# Altium PCB DB4100_POW_v0.3.PcbDoc
Units mil, origin at the board's own origin, x right, y up, seen from the top; angles counter-clockwise.
Board outline 3937.01 x 866.14 mil, 2 copper layers (Top Layer, Bottom Layer); 3 components, 75 nets, 10 pads, 0 vias.
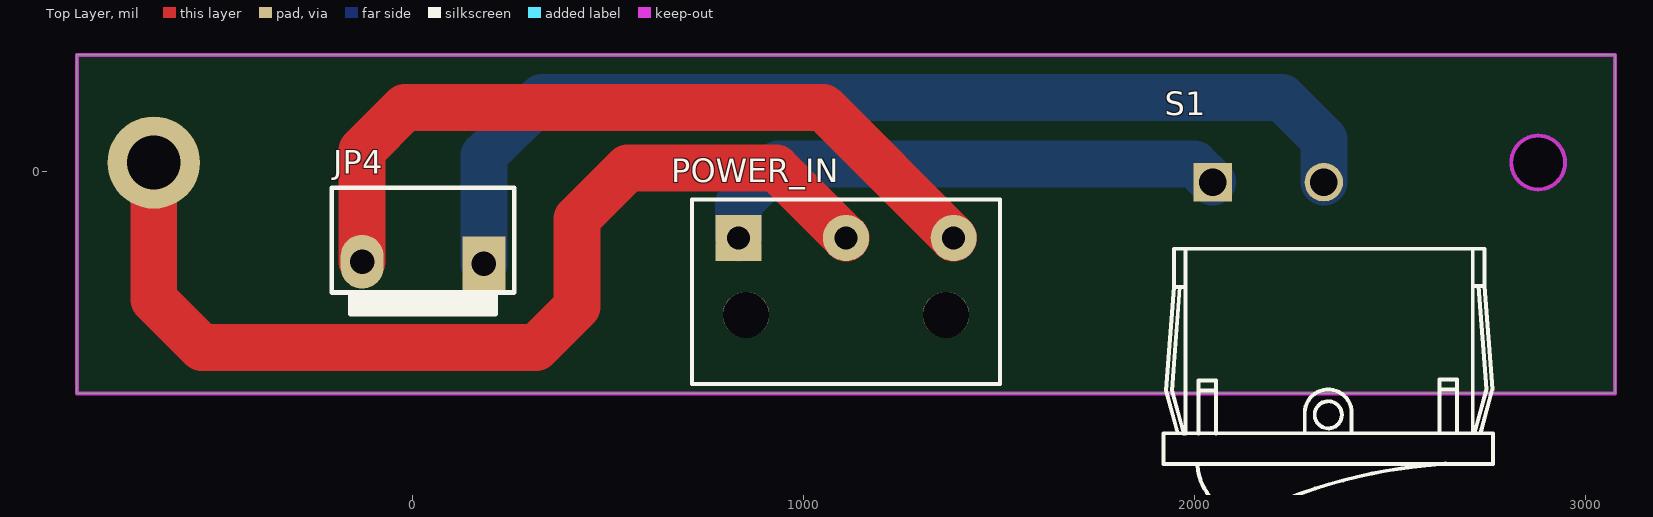
[diagram p0: Top Layer view]
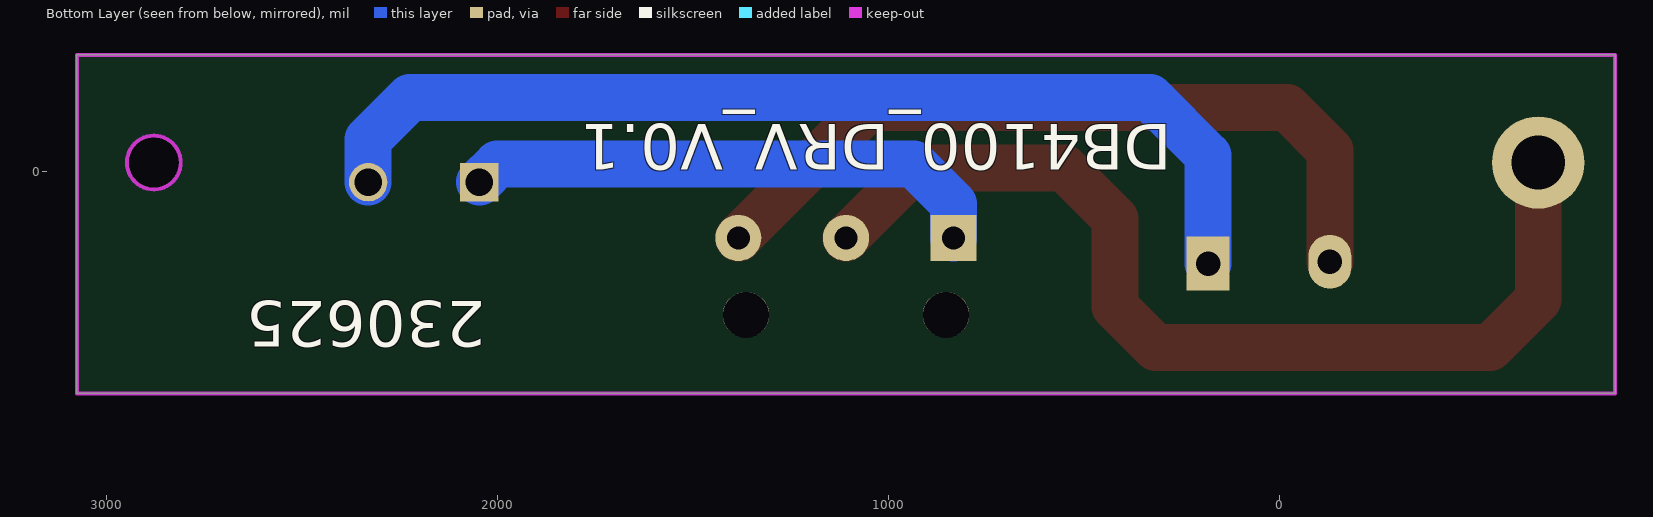
[diagram p1: Bottom Layer view, seen from below]
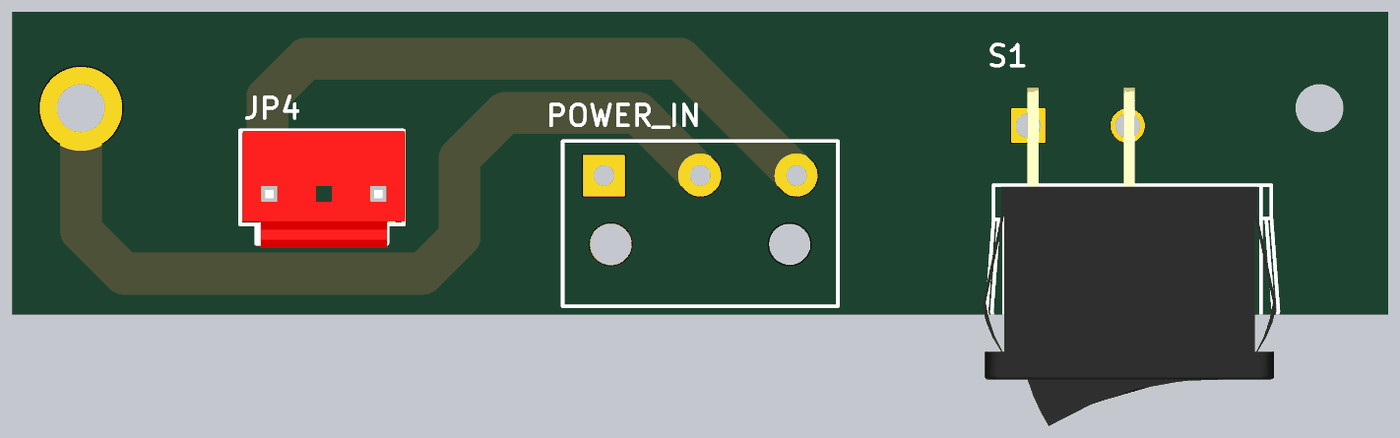
[diagram p2: 3D render of the assembled board from above, using the file's embedded part models]

## Layer stack, top to bottom
Top Solder: solder mask 0.4, Solder Resist, Dk 3.5
Top Layer: signal copper 1.4
Dielectric 1: dielectric 12.6, FR-4, Dk 4.8
Bottom Layer: signal copper 1.4
Bottom Solder: solder mask 0.4, Solder Resist, Dk 3.5

## Board outline
-860,-566.81 -860,299.33 3077.01,299.33 3077.01,-566.81
cut-out: 2811.26,23.74 ccw(c2880.16,23.74) 2880.16,-45.16 ccw(c2880.16,23.74) 2949.06,23.74 ccw(c2880.16,23.74) 2880.16,92.64 ccw(c2880.16,23.74)

## Design rules (kind name [scope] priority, off if disabled: settings)
Clearance [All] p1: gap=20 ignorepadtopadclearanceinfootprint=FALSE
PlaneClearance [All] p1: clearance=30
PlaneConnect [All] p1: planeconnectstyle=Relief reliefexpansion=30 reliefentries=4 reliefconductorwidth=20 reliefairgap=20
PolygonConnect [All] p1: connectstyle=Relief reliefconductorwidth=10 reliefentries=4 polygonreliefangle="90 Angle" airgapwidth=30
RoutingVias [All] p1: holewidth=28 width=50 viastyle="Through Hole" minholewidth=28 minwidth=50 maxholewidth=28 maxwidth=50
SolderMaskExpansion [All] p1: expansion=4
Width [All] p1: maxlimit=120 minlimit=10 preferedwidth=10
28 further rules are at their usual default settings.

## Components (designator, comment, footprint, x,y, rotation, side; value= is the part's Value field where it differs from the comment)
JP4 "HDR-1X2" VH3.96-3A_2P_R 181.81,-230 r180 top locked
POWER_IN "AC_Power" POWER_M 832.91,-169.17 r0 top locked
S1 "SS-12F23" SS11-BBIWJ-R20-R 1921.5,-747.91 r0 top locked

## Footprints (in the part's own frame and the unit in brackets; to place one, negate y for a bottom-side part, rotate by r counter-clockwise, add the part's x,y. Pads: shape width x height; smd on the part's side, far side on the other; paste and mask are expansions set on the pad)
POWER_M [mm] "220v电源插座"
  rect 3x3 hole 1.5: 1(0,0)
  round 3 hole 1.5: 2(7,0) 3(14,0)
  round 3 hole 3: 12(0.5,-5)
  round 3 hole 3 unplated: 12(13.5,-5)
  silkscreen extent -3,-9.5 17,2.5, body extent -4.62,-14.75 18.68,1.91, height 18.22
SS11-BBIWJ-R20-R [mm] "船型开关-卧式-2P"
  rect 2.5x2.5 hole 1.8 paste+0 mask+0.051: 2(3.185,18.325)
  round 2.5 hole 1.8 paste+0 mask+0.051: 3(10.415,18.325)
  silkscreen extent 0,-3.4 21.4,14, body extent -0.17,-3.51 21.23,21.09, height 16.8
VH3.96-3A_2P_R [mm]
  rect 2.8x3.5 hole 1.6: 1(0,0.127)
  oval 2.8x3.5 hole 1.6: 2(7.92,0)
  silkscreen extent -1.98,-4.8 9.9,3.4, body extent -2.1,-4.8 9.72,3.7, height 11

## Part data
JP4: library part "Header 2", "2P接插件", BOM名称=2P接, 学习资源=www.ooocke.
POWER_IN: "AC电源插座"
S1: library part SSW-1P, "1路波动开关", BOM名称=²¨¶, 学习资源=www.ooocke.

## Free pads (board coordinates)
  round 236.22 hole 137.8: 2(-663.15,23.74)

## Nets (pads, with @x,y where several pads share a name; then routed paths per layer and width w, separated by ;. In a path a pad name is that pad's centre, name@x,y a point inside that pad or via, vN(x,y) a via of type N, cw(c..) or ccw(c..) an arc to the next point about the centre after c; other vN are vias at no path point)
3.3V: 
5V: 
5V_IN: 
AD_T1: 
Beep: 
COM1: 
COM2: 
COM3: 
COM4: 
COM5: 
COM6: 
COM7: 
COM8: 
CS: 
DGND: 
EGND: pad.2 POWER_IN.2 | length 2569.8
  Top Layer w120: pad.2 -663.15,-326.85 -540,-450 315,-450 420,-345 420,-120 550,10 929.33,10 POWER_IN.2
GND: 
HEAT: 
K1: 
K2: 
K3: 
K4: 
K5: 
L: JP4.1 S1.3 | length 2642
  Bottom Layer w120: JP4.1 181.81,41.81 330,190 2225,190 2331.54,83.46 S1.3
L_IN: POWER_IN.1 S1.2 | length 1362.6
  Bottom Layer w120: POWER_IN.1 832.91,-82.09 935,20 2000.43,20 S1.2
LED_ADJ: 
N: JP4.2 POWER_IN.3 | length 1983.1
  Top Layer w120: JP4.2 -130,55 -20,165 1049.92,165 POWER_IN.3
NetB1_2: 
NetC11_2: 
NetC24_1: 
NetC24_2: 
NetOP1_2: 
NetOP1_4: 
NetOP1_6: 
NetQ1_1: 
NetQ2_1: 
NetQ4_1: 
NetQ4_3: 
NetR7_2: 
NRST: 
OSC_IN: 
OSC_OUT: 
OUT_N: 
RD: 
SEG1: 
SEG2: 
SEG3: 
SEG4: 
SEG5: 
SEG6: 
SEG7: 
SEG8: 
SEG9: 
SEG10: 
SEG11: 
SEG12: 
SEG13: 
SEG14: 
SEG15: 
SEG16: 
SEG17: 
SEG18: 
SEG19: 
SEG20: 
SEG21: 
SEG22: 
SEG23: 
SEG24: 
SEG25: 
SEG26: 
SEG27: 
SWCLK: 
SWDIO: 
VLED+: 
WR: 
pads on no net: POWER_IN.12

## Keep-outs
Keep-Out Layer:
  circle w10: c2880.16,23.74 r68.9
  lines w10: -860,-566.81 3077.01,-566.81 3077.01,299.33 -860,299.33 -860,-566.81

## Silkscreen, mask and mechanical layers (free items; w line width, h text height)
Bottom Overlay:
  text "DB4100_DRV_V0.1" at 275,160 h200 r180
  text "230625" at 2030,-292.63 h200 r180